# EAGLE board Shift registers sim (EAGLE 9.7.0)

Size 246.89 x 82.4 mm. Coordinates in mm from the lower left corner, seen from the top.
Outline: 0,0 246.89,0 246.89,82.4 0,82.4 0,0
Copper layers (1*16): Top 0.035mm / dielectric 1.5mm / Bottom 0.035mm
Design rules "default": minimum track width 6mil, minimum drill 0.35mm, track to track 6mil, track to pad 6mil, pad to pad 6mil, via to via 6mil, smd to smd 6mil, copper to edge 40mil, drill to drill 6mil, minimum pad ring 10mil, minimum via ring 8mil, stop-mask expansion 4mil, vias tented up to drill 0mil, thermal gap 10mil

## Footprints (pad centres in the part's own frame; a part is rotated, then mirrored left to right if it is on the bottom)
LEDRD254W60D565H860B = drill 0.981 pad 1.581: 1 -1.27,0; 2 1.27,0
RESAD1016W63L850D250B = drill 0.83 pad 1.43: 1 -5.08,0; 2 5.08,0
DIP762W53P254L1969H508Q16B = drill 0.743 pad 1.343: 1 -3.81,8.89; 2 -3.81,6.35; 3 -3.81,3.81; 4 -3.81,1.27; 5 -3.81,-1.27; 6 -3.81,-3.81; 7 -3.81,-6.35; 8 -3.81,-8.89; 9 3.81,-8.89; 10 3.81,-6.35; 11 3.81,-3.81; 12 3.81,-1.27; 13 3.81,1.27; 14 3.81,3.81; 15 3.81,6.35; 16 3.81,8.89
ARDUINO-UNO-R3-SHIELD = drill 1.016 pad 1.88: 3.3V 24.13,-2.54; 5V 24.13,0; A0 24.13,12.7; A1 24.13,15.24; A2 24.13,17.78; A3 24.13,20.32; A4 24.13,22.86; A5 24.13,25.4; AREF -24.13,-13.97; D2 -24.13,20.32; D3 -24.13,17.78; D4 -24.13,15.24; D5 -24.13,12.7; D6 -24.13,10.16; D7 -24.13,7.62; D8 -24.13,3.81; D9 -24.13,1.27; D10 -24.13,-1.27; D11 -24.13,-3.81; D12 -24.13,-6.35; D13 -24.13,-8.89; GND@0 24.13,2.54; GND@1 24.13,5.08; GND@2 -24.13,-11.43; IOREF 24.13,-7.62; NC 24.13,-10.16; RES 24.13,-5.08; RX -24.13,25.4; SCL -24.13,-19.05; SDA -24.13,-16.51; TX -24.13,22.86; VIN 24.13,7.62

## Placement (x,y rotation side)
D1  RED  [LEDRD254W60D565H860B]  163.09,22.96 180 top
D2  RED  [LEDRD254W60D565H860B]  168.17,22.96 180 top
D3  RED  [LEDRD254W60D565H860B]  173.25,22.96 180 top
D4  RED  [LEDRD254W60D565H860B]  178.33,22.96 180 top
D5  RED  [LEDRD254W60D565H860B]  183.41,22.96 180 top
D6  RED  [LEDRD254W60D565H860B]  188.49,22.96 180 top
D7  RED  [LEDRD254W60D565H860B]  193.57,22.96 180 top
D8  RED  [LEDRD254W60D565H860B]  198.65,22.96 180 top
D9  RED  [LEDRD254W60D565H860B]  203.73,22.96 180 top
D10  RED  [LEDRD254W60D565H860B]  208.81,22.96 180 top
D11  RED  [LEDRD254W60D565H860B]  213.89,22.96 180 top
D12  RED  [LEDRD254W60D565H860B]  218.97,22.96 180 top
D13  RED  [LEDRD254W60D565H860B]  224.05,22.96 180 top
D14  RED  [LEDRD254W60D565H860B]  229.13,22.96 180 top
D15  RED  [LEDRD254W60D565H860B]  234.21,22.96 180 top
D16  RED  [LEDRD254W60D565H860B]  239.29,22.96 180 top
R1  620  [RESAD1016W63L850D250B]  169.44,30.58 90 top
R2  620  [RESAD1016W63L850D250B]  164.36,30.58 90 top
R3  620  [RESAD1016W63L850D250B]  174.52,30.58 90 top
R4  620  [RESAD1016W63L850D250B]  179.6,30.58 90 top
R5  620  [RESAD1016W63L850D250B]  184.68,30.58 90 top
R6  620  [RESAD1016W63L850D250B]  189.76,30.58 90 top
R7  620  [RESAD1016W63L850D250B]  194.84,30.58 90 top
R8  620  [RESAD1016W63L850D250B]  199.92,30.58 90 top
R9  620  [RESAD1016W63L850D250B]  205,30.58 90 top
R10  620  [RESAD1016W63L850D250B]  210.08,30.58 90 top
R11  620  [RESAD1016W63L850D250B]  215.16,30.58 90 top
R12  620  [RESAD1016W63L850D250B]  220.24,30.58 90 top
R13  620  [RESAD1016W63L850D250B]  225.32,30.58 90 top
R14  620  [RESAD1016W63L850D250B]  230.4,30.58 90 top
R15  620  [RESAD1016W63L850D250B]  235.48,30.58 90 top
R16  620  [RESAD1016W63L850D250B]  240.56,30.58 90 top
U1  74HC595_PDIP  [DIP762W53P254L1969H508Q16B]  114.83,31.85 270 top
U2  74HC595_PDIP  [DIP762W53P254L1969H508Q16B]  145.31,31.85 270 top
U3  ARDUINO-UNO-R3-SHIELD  [ARDUINO-UNO-R3-SHIELD]  29.84,34.52 180 top

## Library data of the parts
D1-D16 = Tinkercad; CATEGORY: Opto-Electronic; SUB-CATEGORY: LED; VALUE: LED_RED
R1-R16 U1-U3 = Tinkercad

## Nets
D1_A: D1.1 R2.1
D2_A: D2.1 R1.1
D3_A: D3.1 R3.1
D4_A: D4.1 R4.1
D5_A: D5.1 R5.1
D6_A: D6.1 R6.1
D7_A: D7.1 R7.1
D8_A: D8.1 R8.1
D9_A: D9.1 R9.1
D10_A: D10.1 R10.1
D11_A: D11.1 R11.1
D12_A: D12.1 R12.1
D13_A: D13.1 R13.1
D14_A: D14.1 R14.1
D15_A: D15.1 R15.1
D16_A: D16.1 R16.1
U1_Q0: R2.2 U1.15
U1_Q1: R8.2 U1.1
U1_Q2: R7.2 U1.2
U1_Q3: R6.2 U1.3
U1_Q4: R5.2 U1.4
U1_Q5: R4.2 U1.5
U1_Q6: R3.2 U1.6
U1_Q7: R1.2 U1.7
U2_Q0: R9.2 U2.15
U2_Q1: R16.2 U2.1
U2_Q2: R15.2 U2.2
U2_Q3: R14.2 U2.3
U2_Q4: R13.2 U2.4
U2_Q5: R12.2 U2.5
U2_Q6: R11.2 U2.6
U2_Q7: R10.2 U2.7
U2_SER: U1.9 U2.14
U3_5V: U1.16 U2.16 U3.5V
U3_D2: U1.11 U2.11 U3.D2
U3_D3: U1.12 U2.12 U3.D3
U3_D4: U1.10 U2.10 U3.D4
U3_D5: U1.14 U3.D5
U3_GND: D1.2 D2.2 D3.2 D4.2 D5.2 D6.2 D7.2 D8.2 D9.2 D10.2 D11.2 D12.2 D13.2 D14.2 D15.2 D16.2 U1.8 U1.13 U2.8 U2.13 U3.GND@0 U3.GND@1 U3.GND@2

## Tracks (layer width: path | path; a pad name or v marks a point on that pad's centre or on a via)
D1_A  (1 unrouted)
D2_A  (1 unrouted)
D3_A  (1 unrouted)
D4_A  (1 unrouted)
D5_A  (1 unrouted)
D6_A  (1 unrouted)
D7_A  (1 unrouted)
D8_A  (1 unrouted)
D9_A  (1 unrouted)
D10_A  (1 unrouted)
D11_A  (1 unrouted)
D12_A  (1 unrouted)
D13_A  (1 unrouted)
D14_A  (1 unrouted)
D15_A  (1 unrouted)
D16_A  (1 unrouted)
U1_Q0  (1 unrouted)
U1_Q1  (1 unrouted)
U1_Q2  (1 unrouted)
U1_Q3  (1 unrouted)
U1_Q4  (1 unrouted)
U1_Q5  (1 unrouted)
U1_Q6  (1 unrouted)
U1_Q7  (1 unrouted)
U2_Q0  (1 unrouted)
U2_Q1  (1 unrouted)
U2_Q2  (1 unrouted)
U2_Q3  (1 unrouted)
U2_Q4  (1 unrouted)
U2_Q5  (1 unrouted)
U2_Q6  (1 unrouted)
U2_Q7  (1 unrouted)
U2_SER  (1 unrouted)
U3_5V  (2 unrouted)
U3_D2  (2 unrouted)
U3_D3  (2 unrouted)
U3_D4  (2 unrouted)
U3_D5  (1 unrouted)
U3_GND  (22 unrouted)